# Altium PCB Copy of PCB.PcbDoc (part 2 of 3)
Units mil, origin at the board's own origin, x right, y up, seen from the top; angles counter-clockwise.
Board outline 5610.24 x 866.55 mil, 2 copper layers (Top Layer, Bottom Layer), stack 62.17 mil thick; 160 components, 90 nets, 485 pads, 247 vias.
Unrouted connection lines stored in the file: 5.
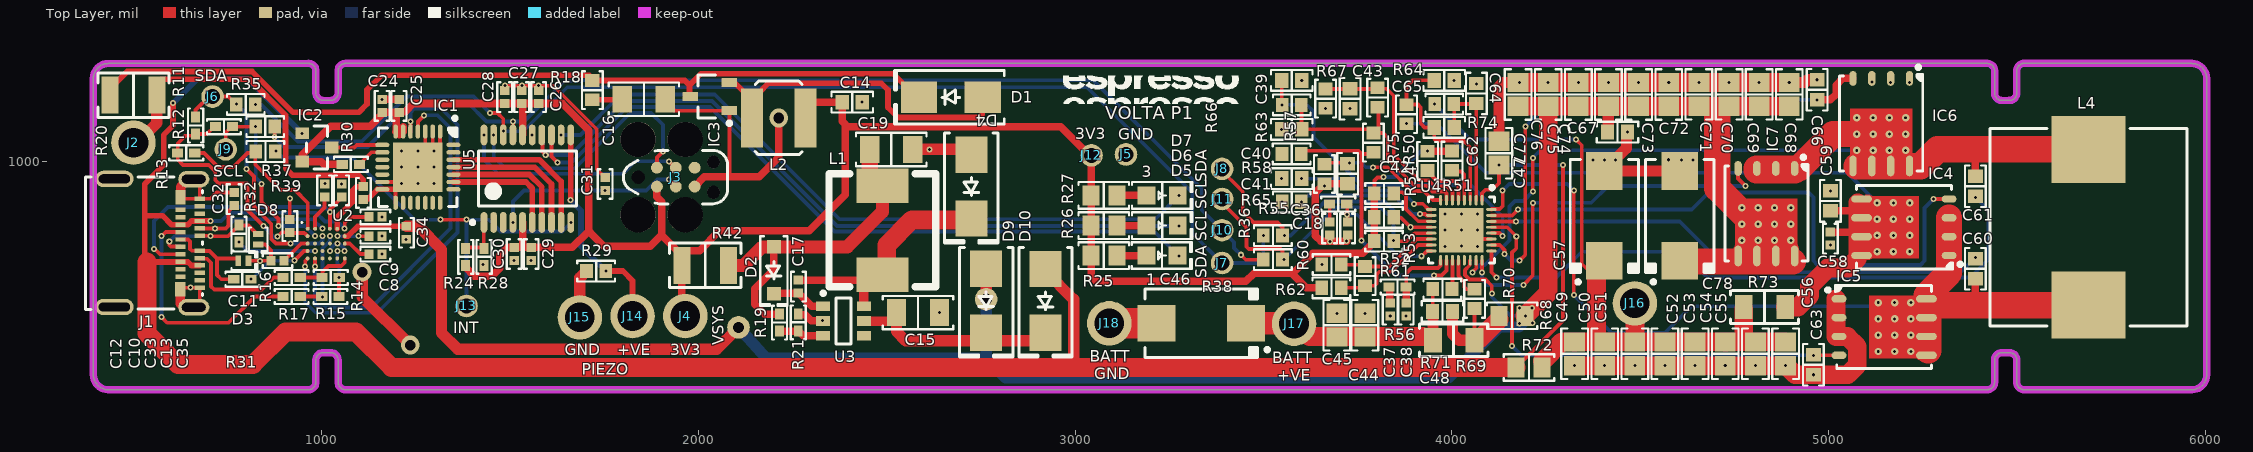
[diagram p0: Top Layer view]

## Part data (continued)
C58: library part UMK105CG102JVHF, "CAP CER 1000PF 50V NP0 0402", Device Package="0402 (1005 Metric)", manufacturer="Taiyo Yuden", Operating Temperature="-55°C ~ 125°C", Ratings=AEC-Q200, Supplier Part Number 1=587-3737-1-ND, Temperature Coefficient="C0G, NP0", Tolerance=±5%, Voltage - Rated=50V, Applications=Automotive, Capacitance="1000 pF", componentlink1description=Datasheet, componentlink1url="https://ds.yuden.co.jp/TYCOMPAS/ut/detail?pn=UMK105CG102JVHF &u=M", componentlink2description="DigiKey Link", componentlink2url=https://www.digikey.com/en/products/detail/taiyo-yuden/UMK105CG102JVHF/4811103, lastupdated="14/08/2022 9:05:57 PM", Lifecycle Status=Active, Minimum Order=1, Mounting Type="Surface Mount, MLCC", Package / Case="0402 (1005 Metric)", packaging=TapeAndReel, partid=1779, Part Number=UMK105CG102JVHF, Part Status=Active, price=0.01, series=M, Size / Dimension="0.039\" L x 0.020\" W (1.00mm x 0.50mm)", Supplier 1=DigiKey, Thickness (Max)="0.022\" (0.55mm)"
C59 C62 C67: library part CGA3E2NP01H103J080AA, "CAP CER 10000PF 50V NP0 0603", Device Package="0603 (1608 Metric)", manufacturer="TDK Corporation", Operating Temperature="-55°C ~ 150°C", Ratings=AEC-Q200, Supplier Part Number 1=445-12383-1-ND, Temperature Coefficient="C0G, NP0", Tolerance=±5%, Voltage - Rated=50V, Applications=Automotive, Capacitance="10000 pF", componentlink1description=Datasheet, componentlink1url=https://product.tdk.com/info/en/catalog/datasheets/mlcc_automotive_hightemp_en.pdf?ref_disty=digikey, componentlink2description="DigiKey Link", componentlink2url=https://www.digikey.com/en/products/detail/tdk-corporation/CGA3E2NP01H103J080AA/3949619, Features="High Temperature", lastupdated="14/08/2022 9:09:46 PM", Lifecycle Status=Active, Minimum Order=1, Mounting Type="Surface Mount, MLCC", Package / Case="0603 (1608 Metric)", packaging=TapeAndReel, partid=2625, Part Number=CGA3E2NP01H103J080AA, Part Status=Active, price=0.08, series=CGA, Size / Dimension="0.063\" L x 0.031\" W (1.60mm x 0.80mm)", Supplier 1=DigiKey, Thickness (Max)="0.035\" (0.90mm)"
C60 C61: library part C0603C473K3RACAUTO, "CAP CER 0.047UF 25V X7R 0603", Device Package="0603 (1608 Metric)", manufacturer=KEMET, Operating Temperature="-55°C ~ 125°C", Ratings=AEC-Q200, Supplier Part Number 1=399-6899-1-ND, Temperature Coefficient=X7R, Tolerance=±10%, Voltage - Rated=25V, Applications="Automotive, Bypass, Decoupling", Capacitance="0.047 µF", componentlink1description=Datasheet, componentlink1url=https://api.kemet.com/component-edge/download/datasheet/C0603C473K3RACAUTO.pdf, componentlink2description="DigiKey Link", componentlink2url=https://www.digikey.com/en/products/detail/kemet/C0603C473K3RACAUTO/3314894, lastupdated="14/08/2022 9:09:47 PM", Lifecycle Status=Active, Minimum Order=1, Mounting Type="Surface Mount, MLCC", Package / Case="0603 (1608 Metric)", packaging=TapeAndReel, partid=2309, Part Number=C0603C473K3RACAUTO, Part Status=Active, price=0.02, series="SMD Auto X7R", Size / Dimension="0.063\" L x 0.031\" W (1.60mm x 0.80mm)", Supplier 1=DigiKey, Thickness (Max)="0.034\" (0.87mm)"
C63 C66: library part CC0603KRNPO9BN151, "CAP CER 150PF 50V C0G/NPO 0603", Device Package="0603 (1608 Metric)", manufacturer=Yageo, Operating Temperature="-55°C ~ 125°C", Supplier Part Number 1=311-4029-1-ND, Temperature Coefficient="C0G, NP0", Tolerance=±10%, Voltage - Rated=50V, Applications="General Purpose", Capacitance="150 pF", componentlink1description=Datasheet, componentlink1url=https://www.yageo.com/upload/media/product/productsearch/datasheet/mlcc/UPY-GP_NP0_16V-to-50V_17.pdf, componentlink2description="DigiKey Link", componentlink2url=https://www.digikey.com/en/products/detail/yageo/CC0603KRNPO9BN151/5883706, lastupdated="14/08/2022 9:09:44 PM", Lifecycle Status=Active, Minimum Order=1, Mounting Type="Surface Mount, MLCC", Package / Case="0603 (1608 Metric)", packaging=TapeAndReel, partid=3558, Part Number=CC0603KRNPO9BN151, Part Status=Active, price=0.01, series=CC, Size / Dimension="0.063\" L x 0.031\" W (1.60mm x 0.80mm)", Supplier 1=DigiKey, Thickness (Max)="0.035\" (0.90mm)"
C64 C65: library part C0603C333K5RACAUTO, "CAP CER 0.033UF 50V X7R 0603", Device Package="0603 (1608 Metric)", manufacturer=KEMET, Operating Temperature="-55°C ~ 125°C", Ratings=AEC-Q200, Supplier Part Number 1=399-6884-1-ND, Temperature Coefficient=X7R, Tolerance=±10%, Voltage - Rated=50V, Applications="Automotive, Bypass, Decoupling", Capacitance="0.033 µF", componentlink1description=Datasheet, componentlink1url=https://api.kemet.com/component-edge/download/datasheet/C0603C333K5RACAUTO.pdf, componentlink2description="DigiKey Link", componentlink2url=https://www.digikey.com/en/products/detail/kemet/C0603C333K5RACAUTO/3314880, lastupdated="14/08/2022 9:09:47 PM", Lifecycle Status=Active, Minimum Order=1, Mounting Type="Surface Mount, MLCC", Package / Case="0603 (1608 Metric)", packaging=TapeAndReel, partid=2224, Part Number=C0603C333K5RACAUTO, Part Status=Active, price=0.01, series="SMD Auto X7R", Size / Dimension="0.063\" L x 0.031\" W (1.60mm x 0.80mm)", Supplier 1=DigiKey, Thickness (Max)="0.034\" (0.87mm)"
D1 D4 D9 D10: "DIODE SCHOTTKY 30V 2A SMB", Capacitance @ Vr, F="200pF @ 4V, 1MHz", Current - Average Rectified (Io)=2A, Current - Reverse Leakage @ Vr="500 µA @ 30 V", manufacturer="Diodes Incorporated", Operating Temperature - Junction="-65°C ~ 150°C", Package / Case="DO-214AA, SMB", Supplier Device Package=SMB, Supplier Part Number 1=B230-FDICT-ND, Voltage - DC Reverse (Vr) (Max)="30 V", Voltage - Forward (Vf) (Max) @ If="500 mV @ 2 A", componentlink1description=Datasheet, componentlink1url=https://www.diodes.com/assets/Datasheets/ds13004.pdf, componentlink2description="DigiKey Link", componentlink2url=https://www.digikey.com/en/products/detail/diodes-incorporated/B230-13-F/814955, Diode Type=Schottky, lastupdated="9/08/2022 12:37:20 PM", Lifecycle Status=Active, Minimum Order=1, Mounting Type="Surface Mount", packaging=TapeAndReel, partid=1539, Part Number=B230-13-F, Part Status=Active, price=0.13, series=-, Speed="Fast Recovery =< 500ns, > 200mA (Io)", Supplier 1=DigiKey
D2: "DIODE GEN PURP 100V 150MA SOD123", Capacitance @ Vr, F="2pF @ 0V, 1MHz", Current - Average Rectified (Io)=150mA, Current - Reverse Leakage @ Vr="1 µA @ 75 V", manufacturer="Micro Commercial Co", Operating Temperature - Junction="-65°C ~ 150°C", Package / Case=SOD-123, Supplier Part Number 1=1N4148WTPMSCT-ND, Voltage - DC Reverse (Vr) (Max)="100 V", Voltage - Forward (Vf) (Max) @ If="1.25 V @ 150 mA", componentlink1description=Datasheet, componentlink1url=https://www.mccsemi.com/pdf/Products/1N4148W(SOD123).pdf, componentlink2description="DigiKey Link", componentlink2url=https://www.digikey.com/en/products/detail/micro-commercial-co/1N4148W-TP/717196, Diode Type=Standard, lastupdated="9/08/2022 12:37:52 PM", Lifecycle Status=Active, Minimum Order=1, Mounting Type="Surface Mount", packaging=TapeAndReel, partid=999, Part Number=1N4148W-TP, Part Status=Active, price=0.02, Reverse Recovery Time (trr)="4 ns", series=-, Speed="Small Signal =< 200mA (Io), Any Speed", Supplier 1=DigiKey, Supplier Device Package=SOD-123
D3 D8: "TVS DIODE 4V 1005", Capacitance @ Frequency="0.05pF @ 1MHz", Device Package="0402 (1005 Metric)", manufacturer="Murata Electronics", Operating Temperature="-40°C ~ 85°C (TA)", Power Line Protection=No, Supplier Device Package=1005, Supplier Part Number 1=490-13210-2-ND, Voltage - Reverse Standoff (Typ)=4V, Applications="General Purpose", Bidirectional Channels=1, componentlink1description=Datasheet, componentlink1url=https://www.murata.com/en-us/products/productdata/8796832759838/CRESD-E.pdf, componentlink2description="DigiKey Link", componentlink2url=http://digikey.com/product-detail/en/murata-electronics/LXES15AAA1-153/490-13210-2-ND/5843762, lastupdated="9/08/2022 12:53:02 PM", Lifecycle Status=Active, Minimum Order=0, Mounting Type="Surface Mount", Package / Case="0402 (1005 Metric)", packaging=TapeAndReel, partid=10448, Part Number=LXES15AAA1-153, Part Status=Active, price=0.04, series=-, Supplier 1=DigiKey, Type=Zener
D5 D6 D7: library part QBLP631-IW5, "0805 LED WHITE, YELLOW DIFFUSED", Current - Test=5mA, Device Package="0805 (2012 Metric)", Lens Color=Yellow, manufacturer="QT Brightek (QTB)", Millicandela Rating=85mcd, Supplier Device Package=0805, Supplier Part Number 1=1516-QBLP631-IW5CT-ND, Voltage - Forward (Vf) (Typ)=2.9V, Color=White, componentlink1description=Datasheet, componentlink1url=https://www.qt-brightek.com/datasheet/QBLP631-IW5.pdf, componentlink2description="DigiKey Link", componentlink2url=https://www.digikey.com/en/products/detail/qt-brightek-qtb/QBLP631-IW5/16499651, Configuration=Standard, Height (Max)=0.90mm, lastupdated="9/08/2022 12:43:05 PM", Lens Size="1.30mm x 1.25mm", Lens Style="Rectangle with Flat Top", Lens Transparency=Diffused, Lifecycle Status=Active, Minimum Order=1, Mounting Type="Surface Mount", Package / Case="0805 (2012 Metric)", packaging=TapeAndReel, partid=1097, Part Number=QBLP631-IW5, Part Status=Active, price=0.08, series=QBLP631, Size / Dimension="2.00mm L x 1.25mm W", Supplier 1=DigiKey, Viewing Angle=140°
IC1: "IC USB TO UART BRIDGE QFN28", Current - Supply=9.5mA, manufacturer="Silicon Labs", Operating Temperature="-40°C ~ 85°C (TA)", Package / Case="28-WFQFN Exposed Pad", Supplier Device Package="28-QFN (5x5)", Supplier Part Number 1=336-5890-1-ND, Voltage - Supply="3V ~ 3.6V", componentlink1description=Datasheet, componentlink1url=https://www.silabs.com/documents/public/data-sheets/cp2102n-datasheet.pdf, componentlink2description="DigiKey Link", componentlink2url=http://digikey.com/product-detail/en/silicon-labs/CP2102N-A02-GQFN28R/336-5890-1-ND/9863483, Function="Bridge, USB to UART", Interface=UART, lastupdated="31/07/2020 4:26:30 PM", Lifecycle Status=Active, Minimum Order=1, packaging=TapeAndReel, Part Number=CP2102N-A02-GQFN28R, Part Status=Active, price=1.23, Protocol=USB, series=USBXpress™, Standards="USB 2.0", Supplier 1=DigiKey
IC2: "MOSFET N-CH 60V 210MA SOT23", Current - Continuous Drain (Id) @ 25°C="210mA (Ta)", Drain to Source Voltage (Vdss)="60 V", Drive Voltage (Max Rds On,  Min Rds On)="5V, 10V", Input Capacitance (Ciss) (Max) @ Vds="22 pF @ 25 V", manufacturer="Diodes Incorporated", Operating Temperature="-55°C ~ 150°C (TJ)", Package / Case="TO-236-3, SC-59, SOT-23-3", Power Dissipation (Max)="340mW (Ta)", Supplier Device Package=SOT-23-3, Supplier Part Number 1=DMN67D8L-7DICT-ND, componentlink1description=Datasheet, componentlink1url=https://www.diodes.com/assets/Datasheets/DMN67D8L.pdf, componentlink2description="DigiKey Link", componentlink2url=https://www.digikey.com/en/products/detail/diodes-incorporated/DMN67D8L-7/5768832, FET Type=N-Channel, Gate Charge (Qg) (Max) @ Vgs="0.82 nC @ 10 V", lastupdated="9/08/2022 12:48:06 PM", Lifecycle Status=Active, Minimum Order=1, Mounting Type="Surface Mount", packaging=TapeAndReel, Part Number=DMN67D8L-7, Part Status=Active, price=0.03, Rds On (Max) @ Id, Vgs="5Ohm @ 500mA, 10V", series=-, Supplier 1=DigiKey, Technology="MOSFET (Metal Oxide)", Vgs (Max)=±30V, Vgs(th) (Max) @ Id="2.5V @ 250µA"
IC3: "HT7750B 5V OUT Boost DC/DC Converter 100mA"
IC4 IC5 IC6 IC7: "MOSFET N-CH 30V 25A/100A TDSON", Current - Continuous Drain (Id) @ 25°C="25A (Ta), 100A (Tc)", Drain to Source Voltage (Vdss)="30 V", Drive Voltage (Max Rds On,  Min Rds On)="4.5V, 10V", Input Capacitance (Ciss) (Max) @ Vds="9600 pF @ 15 V", manufacturer="Infineon Technologies", Operating Temperature="-55°C ~ 150°C (TJ)", Package / Case=8-PowerTDFN, Power Dissipation (Max)="2.5W (Ta), 96W (Tc)", Supplier Device Package=PG-TDSON-8-1, Supplier Part Number 1=BSC020N03MSGATMA1CT-ND, componentlink1description=Datasheet, componentlink1url=https://www.infineon.com/dgdl/Infineon-BSC020N03MSG-DS-v02_00-en.pdf?fileId=db3a304313d846880113de4cd99d033e, componentlink2description="DigiKey Link", componentlink2url=https://www.digikey.com/en/products/detail/infineon-technologies/BSC020N03MSGATMA1/1785562, FET Type=N-Channel, Gate Charge (Qg) (Max) @ Vgs="124 nC @ 10 V", lastupdated="14/08/2022 10:09:14 PM", Lifecycle Status=Active, Minimum Order=1, Mounting Type="Surface Mount", packaging=TapeAndReel, Part Number=BSC020N03MSGATMA1, Part Status=Active, price=1.07, Rds On (Max) @ Id, Vgs="2mOhm @ 30A, 10V", series=OptiMOS™, Supplier 1=DigiKey, Technology="MOSFET (Metal Oxide)", Vgs (Max)=±20V, Vgs(th) (Max) @ Id="2V @ 250µA"
J1: "CONN RCP USB3.1 TYPEC 24P SMD RA", Current Rating (Amps)="0.25A, 1A, 5A", manufacturer=Molex, Operating Temperature="-30°C ~ 85°C", Supplier Part Number 1=WM12856CT-ND, Voltage - Rated=30VAC/DC, componentlink1description=Datasheet, componentlink1url=https://www.molex.com/pdm_docs/ps/PS-105448-001.pdf, componentlink2description="DigiKey Link", componentlink2url=http://digikey.com/product-detail/en/molex/1054500101/WM12856CT-ND/5843891, Connector Type="USB - C (Type - C)", Gender=Receptacle, lastupdated="6/06/2020 2:14:04 AM", Lifecycle Status=Active, Mating Cycles=10000, Minimum Order=1, Mounting Feature=Horizontal, Mounting Type="Surface Mount, Right Angle; Through Hole", Number of Contacts=24, Number of Ports=1, packaging=TapeAndReel, Part Number=1054500101, Part Status=Active, price=1.22, series=105445, Shielding=Shielded, Specifications="USB 3.1 (USB 3.1 Gen 2, Superspeed+)", Supplier 1=DigiKey, Termination=Solder
J3: library part TC2030-MCP-NL, "Conector par ICD"
L1: library part 0630CDMCCDS-100MC, "4A 10uH ±20% 67mO SMD,7x6.6x2.8mm Power Inductors ROHS"
L2: library part NRS5030T470MMGJ, "FIXED IND 47UH 700MA 325MOHM SMD", Current - Saturation=950mA, Current Rating (Amps)="700 mA", DC Resistance (DCR)=325mOhm, Device Package=Nonstandard, Frequency - Self Resonant=9MHz, Inductance Frequency - Test="100 kHz", manufacturer="Taiyo Yuden", Operating Temperature="-25°C ~ 120°C", Supplier Part Number 1=587-3460-1-ND, Tolerance=±20%, componentlink1description=Datasheet, componentlink1url=https://www.yuden.co.jp/productdata/catalog/wound04_e.pdf, componentlink2description="DigiKey Link", componentlink2url=https://www.digikey.com/en/products/detail/taiyo-yuden/NRS5030T470MMGJ/4157848, Height - Seated (Max)="0.118\" (3.00mm)", Inductance="47 µH", lastupdated="9/08/2022 12:53:07 PM", Lifecycle Status=Active, Material - Core=Ferrite, Minimum Order=1, Mounting Type="Surface Mount", Package / Case=Nonstandard, packaging=TapeAndReel, partid=3405, Part Number=NRS5030T470MMGJ, Part Status=Active, price=0.12, series="NR, S Type", Shielding=Shielded, Size / Dimension="0.193\" L x 0.193\" W (4.90mm x 4.90mm)", Supplier 1=DigiKey, Type="Drum Core, Wirewound"
L4: library part 7443551470, "FIXED IND 4.7UH 13A 7 MOHM SMD", Current - Saturation=15A, Current Rating (Amps)="13 A", DC Resistance (DCR)=7mOhm, Device Package=Nonstandard, Frequency - Self Resonant=30MHz, Inductance Frequency - Test="100 kHz", manufacturer="Würth Elektronik", Operating Temperature="-40°C ~ 155°C", Ratings=AEC-Q200, Supplier Device Package=1365, Supplier Part Number 1=732-1128-1-ND, Tolerance=±20%, componentlink1description=Datasheet, componentlink1url=https://katalog.we-online.de/pbs/datasheet/7443551470.pdf, componentlink2description="DigiKey Link", componentlink2url=https://www.digikey.com/en/products/detail/würth-elektronik/7443551470/1638533, Height - Seated (Max)="0.256\" (6.50mm)", Inductance="4.7 µH", lastupdated="14/08/2022 10:14:11 PM", Lifecycle Status=Active, Material - Core=Nonstandard, Minimum Order=1, Mounting Type="Surface Mount", Package / Case=Nonstandard, packaging=TapeAndReel, partid=5638, Part Number=7443551470, Part Status=Active, price=2.50, series=WE-HCI, Shielding=Shielded, Size / Dimension="0.512\" L x 0.504\" W (13.00mm x 12.80mm)", Supplier 1=DigiKey, Type=Wirewound
R11 R12: library part TNPW04022K20BYEP, "RES 2.2K OHM 0.1% 1/10W 0402", Device Package="0402 (1005 Metric)", manufacturer="Vishay Dale", Operating Temperature="-55°C ~ 155°C", Power (Watts)="0.1W, 1/10W", Ratings=AEC-Q200, Supplier Device Package=0402, Supplier Part Number 1=541-9805-1-ND, Temperature Coefficient=±10ppm/°C, Tolerance=±0.1%, componentlink1description=Datasheet, componentlink1url=http://www.vishay.com/docs/28758/tnpw_e3.pdf, componentlink2description="DigiKey Link", componentlink2url=https://www.digikey.com/en/products/detail/vishay-dale/TNPW04022K20BYEP/8636618, Composition="Thin Film", Features="Anti-Sulfur, Automotive AEC-Q200, Moisture Resistant", Height - Seated (Max)="0.016\" (0.40mm)", lastupdated="9/08/2022 12:11:02 PM", Lifecycle Status=Active, Minimum Order=1, Number of Terminations=2, Package / Case="0402 (1005 Metric)", packaging=TapeAndReel, partid=3077, Part Number=TNPW04022K20BYEP, Part Status=Active, price=0.28, Resistance="2.2 kOhms", series="TNPW e3", Size / Dimension="0.039\" L x 0.020\" W (1.00mm x 0.50mm)", Supplier 1=DigiKey
R13: library part RP73PF1E200KBTD, "RES 200K OHM 0.1% 1/10W 0402", Device Package="0402 (1005 Metric)", manufacturer="TE Connectivity Passive Product", Operating Temperature="-55°C ~ 155°C", Power (Watts)="0.1W, 1/10W", Supplier Device Package=0402, Supplier Part Number 1=A127540CT-ND, Temperature Coefficient=±25ppm/°C, Tolerance=±0.1%, componentlink1description=Datasheet, componentlink1url=https://www.te.com/commerce/DocumentDelivery/DDEController?Action=srchrtrv&DocNm=1773272&DocType=DS&DocLang=English, componentlink2description="DigiKey Link", componentlink2url=https://www.digikey.com/en/products/detail/te-connectivity-passive-product/RP73PF1E200KBTD/8261082, Composition="Thin Film", Height - Seated (Max)="0.014\" (0.35mm)", lastupdated="9/08/2022 12:11:04 PM", Lifecycle Status=Active, Minimum Order=1, Number of Terminations=2, Package / Case="0402 (1005 Metric)", packaging=TapeAndReel, partid=2427, Part Number=RP73PF1E200KBTD, Part Status=Active, price=0.09, Resistance="200 kOhms", series="RP73, Holsworthy", Size / Dimension="0.039\" L x 0.020\" W (1.00mm x 0.50mm)", Supplier 1=DigiKey
R14 R15: library part RMCF0402FT649K, "RES 649K OHM 1% 1/16W 0402", Device Package="0402 (1005 Metric)", manufacturer="Stackpole Electronics Inc", Operating Temperature="-55°C ~ 155°C", Power (Watts)="0.063W, 1/16W", Ratings=AEC-Q200, Supplier Device Package=0402, Supplier Part Number 1=RMCF0402FT649KCT-ND, Temperature Coefficient=±100ppm/°C, Tolerance=±1%, componentlink1description=Datasheet, componentlink1url=https://www.seielect.com/catalog/sei-rmcf_rmcp.pdf, componentlink2description="DigiKey Link", componentlink2url=https://www.digikey.com/en/products/detail/stackpole-electronics-inc/RMCF0402FT649K/1714842, Composition="Thick Film", Features="Automotive AEC-Q200", Height - Seated (Max)="0.016\" (0.40mm)", lastupdated="9/08/2022 12:10:57 PM", Lifecycle Status=Active, Minimum Order=1, Number of Terminations=2, Package / Case="0402 (1005 Metric)", packaging=CutTape, partid=4689, Part Number=RMCF0402FT649K, Part Status=Active, price=0.01, Resistance="649 kOhms", series=RMCF, Size / Dimension="0.039\" L x 0.020\" W (1.00mm x 0.50mm)", Supplier 1=DigiKey
R16 R17: library part RC0402FR-07120KL, "RES 120K OHM 1% 1/16W 0402", Device Package="0402 (1005 Metric)", manufacturer=Yageo, Operating Temperature="-55°C ~ 155°C", Power (Watts)="0.063W, 1/16W", Supplier Device Package=0402, Supplier Part Number 1=311-120KLRCT-ND, Temperature Coefficient=±100ppm/°C, Tolerance=±1%, componentlink1description=Datasheet, componentlink1url=https://www.yageo.com/upload/media/product/productsearch/datasheet/rchip/PYu-RC_Group_51_RoHS_L_10.pdf, componentlink2description="DigiKey Link", componentlink2url=https://www.digikey.com/en/products/detail/yageo/RC0402FR-07120KL/726534, Composition="Thick Film", Features="Moisture Resistant", Height - Seated (Max)="0.016\" (0.40mm)", lastupdated="9/08/2022 12:11:03 PM", Lifecycle Status=Active, Minimum Order=1, Number of Terminations=2, Package / Case="0402 (1005 Metric)", packaging=CutTape, partid=2770, Part Number=RC0402FR-07120KL, Part Status=Active, price=0.01, Resistance="120 kOhms", series=RC_L, Size / Dimension="0.039\" L x 0.020\" W (1.00mm x 0.50mm)", Supplier 1=DigiKey
R18: library part KDV06DR150ET, "RES 0.15 OHM 0.5% 1/5W 0603", Device Package="0603 (1608 Metric)", manufacturer=Ohmite, Operating Temperature="-55°C ~ 155°C", Power (Watts)="0.2W, 1/5W", Supplier Device Package=0603, Supplier Part Number 1=273-KDV06DR150ETCT-ND, Temperature Coefficient=±50ppm/°C, Tolerance=±0.5%, componentlink1description=Datasheet, componentlink1url=https://www.ohmite.com/assets/docs/res_kdv.pdf?r=false, componentlink2description="DigiKey Link", componentlink2url=https://www.digikey.com/en/products/detail/ohmite/KDV06DR150ET/10476538, Composition="Metal Film", Features="Current Sense", Height - Seated (Max)="0.022\" (0.55mm)", lastupdated="9/08/2022 12:17:13 PM", Lifecycle Status=Active, Minimum Order=1, Number of Terminations=2, Package / Case="0603 (1608 Metric)", packaging=TapeAndReel, partid=17718, Part Number=KDV06DR150ET, Part Status=Active, price=0.03, Resistance="150 mOhms", series=KDV, Size / Dimension="0.063\" L x 0.031\" W (1.60mm x 0.80mm)", Supplier 1=DigiKey
R19: library part RP73PF1E100KBTD, "RES 100K OHM 0.1% 1/10W 0402", Device Package="0402 (1005 Metric)", manufacturer="TE Connectivity Passive Product", Operating Temperature="-55°C ~ 155°C", Power (Watts)="0.1W, 1/10W", Supplier Device Package=0402, Supplier Part Number 1=A127511CT-ND, Temperature Coefficient=±25ppm/°C, Tolerance=±0.1%, componentlink1description=Datasheet, componentlink1url=https://www.te.com/commerce/DocumentDelivery/DDEController?Action=srchrtrv&DocNm=1773272&DocType=DS&DocLang=English, componentlink2description="DigiKey Link", componentlink2url=https://www.digikey.com/en/products/detail/te-connectivity-passive-product/RP73PF1E100KBTD/8261053, Composition="Thin Film", Height - Seated (Max)="0.014\" (0.35mm)", lastupdated="9/08/2022 12:11:04 PM", Lifecycle Status=Active, Minimum Order=1, Number of Terminations=2, Package / Case="0402 (1005 Metric)", packaging=TapeAndReel, partid=2436, Part Number=RP73PF1E100KBTD, Part Status=Active, price=0.09, Resistance="100 kOhms", series="RP73, Holsworthy", Size / Dimension="0.039\" L x 0.020\" W (1.00mm x 0.50mm)", Supplier 1=DigiKey
R20 R42: library part RC1210JR-070RL, "RES 0 OHM JUMPER 1/2W 1210", Device Package="1210 (3225 Metric)", manufacturer=Yageo, Operating Temperature="-55°C ~ 155°C", Power (Watts)="0.5W, 1/2W", Supplier Device Package=1210, Supplier Part Number 1=YAG3375CT-ND, Tolerance=Jumper, componentlink1description=Datasheet, componentlink1url=https://www.yageo.com/upload/media/product/productsearch/datasheet/rchip/PYu-RC_Group_51_RoHS_L_10.pdf, componentlink2description="DigiKey Link", componentlink2url=https://www.digikey.com/en/products/detail/yageo/RC1210JR-070RL/5919839, Composition="Thick Film", Features="Moisture Resistant", Height - Seated (Max)="0.024\" (0.60mm)", lastupdated="9/08/2022 12:50:16 PM", Lifecycle Status=Active, Minimum Order=1, Number of Terminations=2, Package / Case="1210 (3225 Metric)", packaging=TapeAndReel, Part Number=RC1210JR-070RL, Part Status=Active, price=0.01, Resistance="0 Ohms", series=RC_L, Size / Dimension="0.122\" L x 0.102\" W (3.10mm x 2.60mm)", Supplier 1=DigiKey
R21: library part CPF0402B32K4E1, "RES SMD 32.4KOHM 0.1% 1/16W 0402", Device Package="0402 (1005 Metric)", manufacturer="TE Connectivity Passive Product", Operating Temperature="-55°C ~ 155°C", Power (Watts)="0.063W, 1/16W", Supplier Device Package=0402, Supplier Part Number 1=A102795CT-ND, Temperature Coefficient=±25ppm/°C, Tolerance=±0.1%, componentlink1description=Datasheet, componentlink1url=https://www.te.com/commerce/DocumentDelivery/DDEController?Action=srchrtrv&DocNm=1773200&DocType=DS&DocLang=English, componentlink2description="DigiKey Link", componentlink2url=https://www.digikey.com/en/products/detail/te-connectivity-passive-product/CPF0402B32K4E1/2382531, Composition="Thin Film", Height - Seated (Max)="0.014\" (0.35mm)", lastupdated="9/08/2022 12:10:59 PM", Lifecycle Status=Active, Minimum Order=1, Number of Terminations=2, Package / Case="0402 (1005 Metric)", packaging=TapeAndReel, partid=4116, Part Number=CPF0402B32K4E1, Part Status=Active, price=0.15, Resistance="32.4 kOhms", series="CPF, Neohm", Size / Dimension="0.039\" L x 0.020\" W (1.00mm x 0.50mm)", Supplier 1=DigiKey
R24 R28: library part RC0402FR-07510RL, "RES 510 OHM 1% 1/16W 0402", Device Package="0402 (1005 Metric)", manufacturer=Yageo, Operating Temperature="-55°C ~ 155°C", Power (Watts)="0.063W, 1/16W", Supplier Device Package=0402, Supplier Part Number 1=311-510LRCT-ND, Temperature Coefficient=±100ppm/°C, Tolerance=±1%, componentlink1description=Datasheet, componentlink1url=https://www.yageo.com/upload/media/product/productsearch/datasheet/rchip/PYu-RC_Group_51_RoHS_L_10.pdf, componentlink2description="DigiKey Link", componentlink2url=https://www.digikey.com/en/products/detail/yageo/RC0402FR-07510RL/726632, Composition="Thick Film", Features="Moisture Resistant", Height - Seated (Max)="0.016\" (0.40mm)", lastupdated="9/08/2022 12:11:03 PM", Lifecycle Status=Active, Minimum Order=1, Number of Terminations=2, Package / Case="0402 (1005 Metric)", packaging=CutTape, partid=2587, Part Number=RC0402FR-07510RL, Part Status=Active, price=0.01, Resistance="510 Ohms", series=RC_L, Size / Dimension="0.039\" L x 0.020\" W (1.00mm x 0.50mm)", Supplier 1=DigiKey
R25 R26 R27: library part CPF0805B10RE, "RES SMD 10 OHM 0.1% 1/10W 0805", Device Package="0805 (2012 Metric)", manufacturer="TE Connectivity Passive Product", Operating Temperature="-55°C ~ 155°C", Power (Watts)="0.1W, 1/10W", Supplier Device Package=0805, Supplier Part Number 1=A119971CT-ND, Temperature Coefficient=±25ppm/°C, Tolerance=±0.1%, componentlink1description=Datasheet, componentlink1url=https://www.te.com/commerce/DocumentDelivery/DDEController?Action=srchrtrv&DocNm=1773200&DocType=DS&DocLang=English, componentlink2description="DigiKey Link", componentlink2url=https://www.digikey.com/en/products/detail/te-connectivity-passive-product/CPF0805B10RE/4966426, Composition="Thin Film", Height - Seated (Max)="0.026\" (0.65mm)", lastupdated="9/08/2022 12:30:18 PM", Lifecycle Status=Active, Minimum Order=1, Number of Terminations=2, Package / Case="0805 (2012 Metric)", packaging=TapeAndReel, partid=27727, Part Number=CPF0805B10RE, Part Status=Active, price=0.10, Resistance="10 Ohms", series="CPF, Neohm", Size / Dimension="0.079\" L x 0.049\" W (2.00mm x 1.25mm)", Supplier 1=DigiKey
R29: library part RMCF0603JT1M00, "RES 1M OHM 5% 1/10W 0603", Device Package="0603 (1608 Metric)", manufacturer="Stackpole Electronics Inc", Operating Temperature="-55°C ~ 155°C", Power (Watts)="0.1W, 1/10W", Ratings=AEC-Q200, Supplier Device Package=0603, Supplier Part Number 1=RMCF0603JT1M00CT-ND, Temperature Coefficient=±200ppm/°C, Tolerance=±5%, componentlink1description=Datasheet, componentlink1url=https://www.seielect.com/catalog/sei-rmcf_rmcp.pdf, componentlink2description="DigiKey Link", componentlink2url=https://www.digikey.com/en/products/detail/stackpole-electronics-inc/RMCF0603JT1M00/1758066, Composition="Thick Film", Features="Automotive AEC-Q200", Height - Seated (Max)="0.022\" (0.55mm)", lastupdated="9/08/2022 12:17:55 PM", Lifecycle Status=Active, Minimum Order=1, Number of Terminations=2, Package / Case="0603 (1608 Metric)", packaging=CutTape, partid=5847, Part Number=RMCF0603JT1M00, Part Status=Active, price=0.01, Resistance="1 MOhms", series=RMCF, Size / Dimension="0.061\" L x 0.031\" W (1.55mm x 0.80mm)", Supplier 1=DigiKey
R30: library part AF0402JR-071KL, "RES SMD 1K OHM 5% 1/16W 0402", Device Package="0402 (1005 Metric)", manufacturer=Yageo, Operating Temperature="-55°C ~ 155°C", Power (Watts)="0.063W, 1/16W", Ratings=AEC-Q200, Supplier Device Package=0402, Supplier Part Number 1=13-AF0402JR-071KLCT-ND, Temperature Coefficient=±100ppm/°C, Tolerance=±5%, componentlink1description=Datasheet, componentlink1url=https://www.yageo.com/upload/media/product/productsearch/datasheet/rchip/PYu-AF_51_RoHS_L_6.pdf, componentlink2description="DigiKey Link", componentlink2url=https://www.digikey.com/en/products/detail/yageo/AF0402JR-071KL/5900732, Composition="Thick Film", Features="Anti-Sulfur, Automotive AEC-Q200", Height - Seated (Max)="0.015\" (0.37mm)", lastupdated="9/08/2022 12:09:39 PM", Lifecycle Status=Active, Minimum Order=1, Number of Terminations=2, Package / Case="0402 (1005 Metric)", packaging=CutTape, partid=68908, Part Number=AF0402JR-071KL, Part Status=Active, price=0.01, Resistance="1 kOhms", series=AF, Size / Dimension="0.039\" L x 0.020\" W (1.00mm x 0.50mm)", Supplier 1=DigiKey
R31 R32: library part RC0402JR-071RL, "RES 1 OHM 5% 1/16W 0402", Device Package="0402 (1005 Metric)", manufacturer=Yageo, Operating Temperature="-55°C ~ 155°C", Power (Watts)="0.063W, 1/16W", Supplier Device Package=0402, Supplier Part Number 1=311-1.0JRCT-ND, Temperature Coefficient=±200ppm/°C, Tolerance=±5%, componentlink1description=Datasheet, componentlink1url=https://www.yageo.com/upload/media/product/productsearch/datasheet/rchip/PYu-RC_Group_51_RoHS_L_10.pdf, componentlink2description="DigiKey Link", componentlink2url=https://www.digikey.com/en/products/detail/yageo/RC0402JR-071RL/726407, Composition="Thick Film", Features="Moisture Resistant", Height - Seated (Max)="0.016\" (0.40mm)", lastupdated="9/08/2022 12:11:01 PM", Lifecycle Status=Active, Minimum Order=1, Number of Terminations=2, Package / Case="0402 (1005 Metric)", packaging=CutTape, partid=3408, Part Number=RC0402JR-071RL, Part Status=Active, price=0.01, Resistance="1 Ohms", series=RC_L, Size / Dimension="0.039\" L x 0.020\" W (1.00mm x 0.50mm)", Supplier 1=DigiKey
R35 R36 R37 R38 R39: library part RCA06030000ZSEA, "RES SMD 0 OHM JUMPER 1/10W 0603", Device Package="0603 (1608 Metric)", manufacturer="Vishay Dale", Operating Temperature="-55°C ~ 155°C", Power (Watts)="0.1W, 1/10W", Ratings=AEC-Q200, Supplier Device Package=0603, Supplier Part Number 1=541-2192-1-ND, Tolerance=Jumper, componentlink1description=Datasheet, componentlink1url=http://www.vishay.com/docs/20037/rcae3.pdf, componentlink2description="DigiKey Link", componentlink2url=https://www.digikey.com/en/products/detail/vishay-dale/RCA06030000ZSEA/4946761, Composition="Thick Film", Features="Anti-Sulfur, Automotive AEC-Q200", Height - Seated (Max)="0.020\" (0.50mm)", lastupdated="9/08/2022 12:17:56 PM", Lifecycle Status=Active, Minimum Order=1, Number of Terminations=2, Package / Case="0603 (1608 Metric)", packaging=TapeAndReel, partid=5740, Part Number=RCA06030000ZSEA, Part Status=Active, price=0.01, Resistance="0 Ohms", series=RCA, Size / Dimension="0.061\" L x 0.033\" W (1.55mm x 0.85mm)", Supplier 1=DigiKey
R50 R51 R52 R53 R54 R62: library part RK73B1JTTD103J, "RES 10K OHM 5% 1/10W 0603", Device Package="0603 (1608 Metric)", manufacturer="KOA Speer Electronics, Inc.", Operating Temperature="-55°C ~ 155°C", Power (Watts)="0.1W, 1/10W", Ratings=AEC-Q200, Supplier Device Package=0603, Supplier Part Number 1=2019-RK73B1JTTD103JCT-ND, Temperature Coefficient=±200ppm/°C, Tolerance=±5%, componentlink1description=Datasheet, componentlink1url=http://www.koaspeer.com/catimages/Products/RK73B/RK73B.pdf, componentlink2description="DigiKey Link", componentlink2url=https://www.digikey.com/en/products/detail/koa-speer-electronics-inc/RK73B1JTTD103J/9844697, Composition="Thick Film", Features="Automotive AEC-Q200", Height - Seated (Max)="0.022\" (0.55mm)", lastupdated="14/08/2022 9:31:25 PM", Lifecycle Status=Active, Minimum Order=1, Number of Terminations=2, Package / Case="0603 (1608 Metric)", packaging=CutTape, partid=5833, Part Number=RK73B1JTTD103J, Part Status=Active, price=0.01, Resistance="10 kOhms", series=RK73B, Size / Dimension="0.063\" L x 0.031\" W (1.60mm x 0.80mm)", Supplier 1=DigiKey
R55: library part RC0402FR-0740K2L, "RES 40.2K OHM 1% 1/16W 0402", Device Package="0402 (1005 Metric)", manufacturer=Yageo, Operating Temperature="-55°C ~ 155°C", Power (Watts)="0.063W, 1/16W", Supplier Device Package=0402, Supplier Part Number 1=311-40.2KLRCT-ND, Temperature Coefficient=±100ppm/°C, Tolerance=±1%, componentlink1description=Datasheet, componentlink1url=https://www.yageo.com/upload/media/product/productsearch/datasheet/rchip/PYu-RC_Group_51_RoHS_L_10.pdf, componentlink2description="DigiKey Link", componentlink2url=https://www.digikey.com/en/products/detail/yageo/RC0402FR-0740K2L/726607, Composition="Thick Film", Features="Moisture Resistant", Height - Seated (Max)="0.016\" (0.40mm)", lastupdated="14/08/2022 9:24:17 PM", Lifecycle Status=Active, Minimum Order=1, Number of Terminations=2, Package / Case="0402 (1005 Metric)", packaging=CutTape, partid=2526, Part Number=RC0402FR-0740K2L, Part Status=Active, price=0.01, Resistance="40.2 kOhms", series=RC_L, Size / Dimension="0.039\" L x 0.020\" W (1.00mm x 0.50mm)", Supplier 1=DigiKey
R56: library part RC0402FR-1315KL, "RES 15K OHM 1% 1/16W 0402", Device Package="0402 (1005 Metric)", manufacturer=Yageo, Operating Temperature="-55°C ~ 155°C", Power (Watts)="0.063W, 1/16W", Supplier Device Package=0402, Supplier Part Number 1=13-RC0402FR-1315KLTR-ND, Temperature Coefficient=±100ppm/°C, Tolerance=±1%, componentlink1description=Datasheet, componentlink1url=https://www.yageo.com/upload/media/product/productsearch/datasheet/rchip/PYu-RC_Group_51_RoHS_L_11.pdf, componentlink2description="DigiKey Link", componentlink2url=https://www.digikey.com/en/products/detail/yageo/RC0402FR-1315KL/13694190, Composition="Thick Film", Features="Moisture Resistant", Height - Seated (Max)="0.016\" (0.40mm)", lastupdated="14/08/2022 9:22:52 PM", Lifecycle Status=Active, Minimum Order=50000, Number of Terminations=2, Package / Case="0402 (1005 Metric)", partid=65094, Part Number=RC0402FR-1315KL, Part Status=Active, price=0, Resistance="15 kOhms", series=RC_L, Size / Dimension="0.039\" L x 0.020\" W (1.00mm x 0.50mm)", Supplier 1=DigiKey
R57: library part RK73B1JTTD154J, "RES 150K OHM 5% 1/10W 0603", Device Package="0603 (1608 Metric)", manufacturer="KOA Speer Electronics, Inc.", Operating Temperature="-55°C ~ 155°C", Power (Watts)="0.1W, 1/10W", Ratings=AEC-Q200, Supplier Device Package=0603, Supplier Part Number 1=2019-RK73B1JTTD154JCT-ND, Temperature Coefficient=±200ppm/°C, Tolerance=±5%, componentlink1description=Datasheet, componentlink1url=http://www.koaspeer.com/catimages/Products/RK73B/RK73B.pdf, componentlink2description="DigiKey Link", componentlink2url=https://www.digikey.com/en/products/detail/koa-speer-electronics-inc/RK73B1JTTD154J/9844780, Composition="Thick Film", Features="Automotive AEC-Q200", Height - Seated (Max)="0.022\" (0.55mm)", lastupdated="14/08/2022 9:31:24 PM", Lifecycle Status=Active, Minimum Order=1, Number of Terminations=2, Package / Case="0603 (1608 Metric)", packaging=CutTape, partid=5945, Part Number=RK73B1JTTD154J, Part Status=Active, price=0.01, Resistance="150 kOhms", series=RK73B, Size / Dimension="0.063\" L x 0.031\" W (1.60mm x 0.80mm)", Supplier 1=DigiKey
R58: library part RT0603FRE07100KL, "RES SMD 100K OHM 1% 1/10W 0603", Device Package="0603 (1608 Metric)", manufacturer=Yageo, Operating Temperature="-55°C ~ 155°C", Power (Watts)="0.1W, 1/10W", Supplier Device Package=0603, Supplier Part Number 1=YAG2319CT-ND, Temperature Coefficient=±50ppm/°C, Tolerance=±1%, componentlink1description=Datasheet, componentlink1url=https://www.yageo.com/upload/media/product/productsearch/datasheet/rchip/PYu-RT_1-to-0.01_RoHS_L_11.pdf, componentlink2description="DigiKey Link", componentlink2url=https://www.digikey.com/en/products/detail/yageo/RT0603FRE07100KL/1075029, Composition="Thin Film", Height - Seated (Max)="0.022\" (0.55mm)", lastupdated="14/08/2022 9:31:25 PM", Lifecycle Status=Active, Minimum Order=1, Number of Terminations=2, Package / Case="0603 (1608 Metric)", packaging=TapeAndReel, partid=5677, Part Number=RT0603FRE07100KL, Part Status=Active, price=0.01, Resistance="100 kOhms", series=RT, Size / Dimension="0.063\" L x 0.031\" W (1.60mm x 0.80mm)", Supplier 1=DigiKey